# Altium PCB STAmeba.PcbDoc (part 3 of 3)
Units mm, origin at the board's own origin, x right, y up, seen from the top; angles counter-clockwise.
Board outline 121.75 x 98.31 mm, 2 copper layers (Top Layer, Bottom Layer); 122 components, 112 nets, 521 pads, 187 vias.
Unrouted connection lines stored in the file: 4.
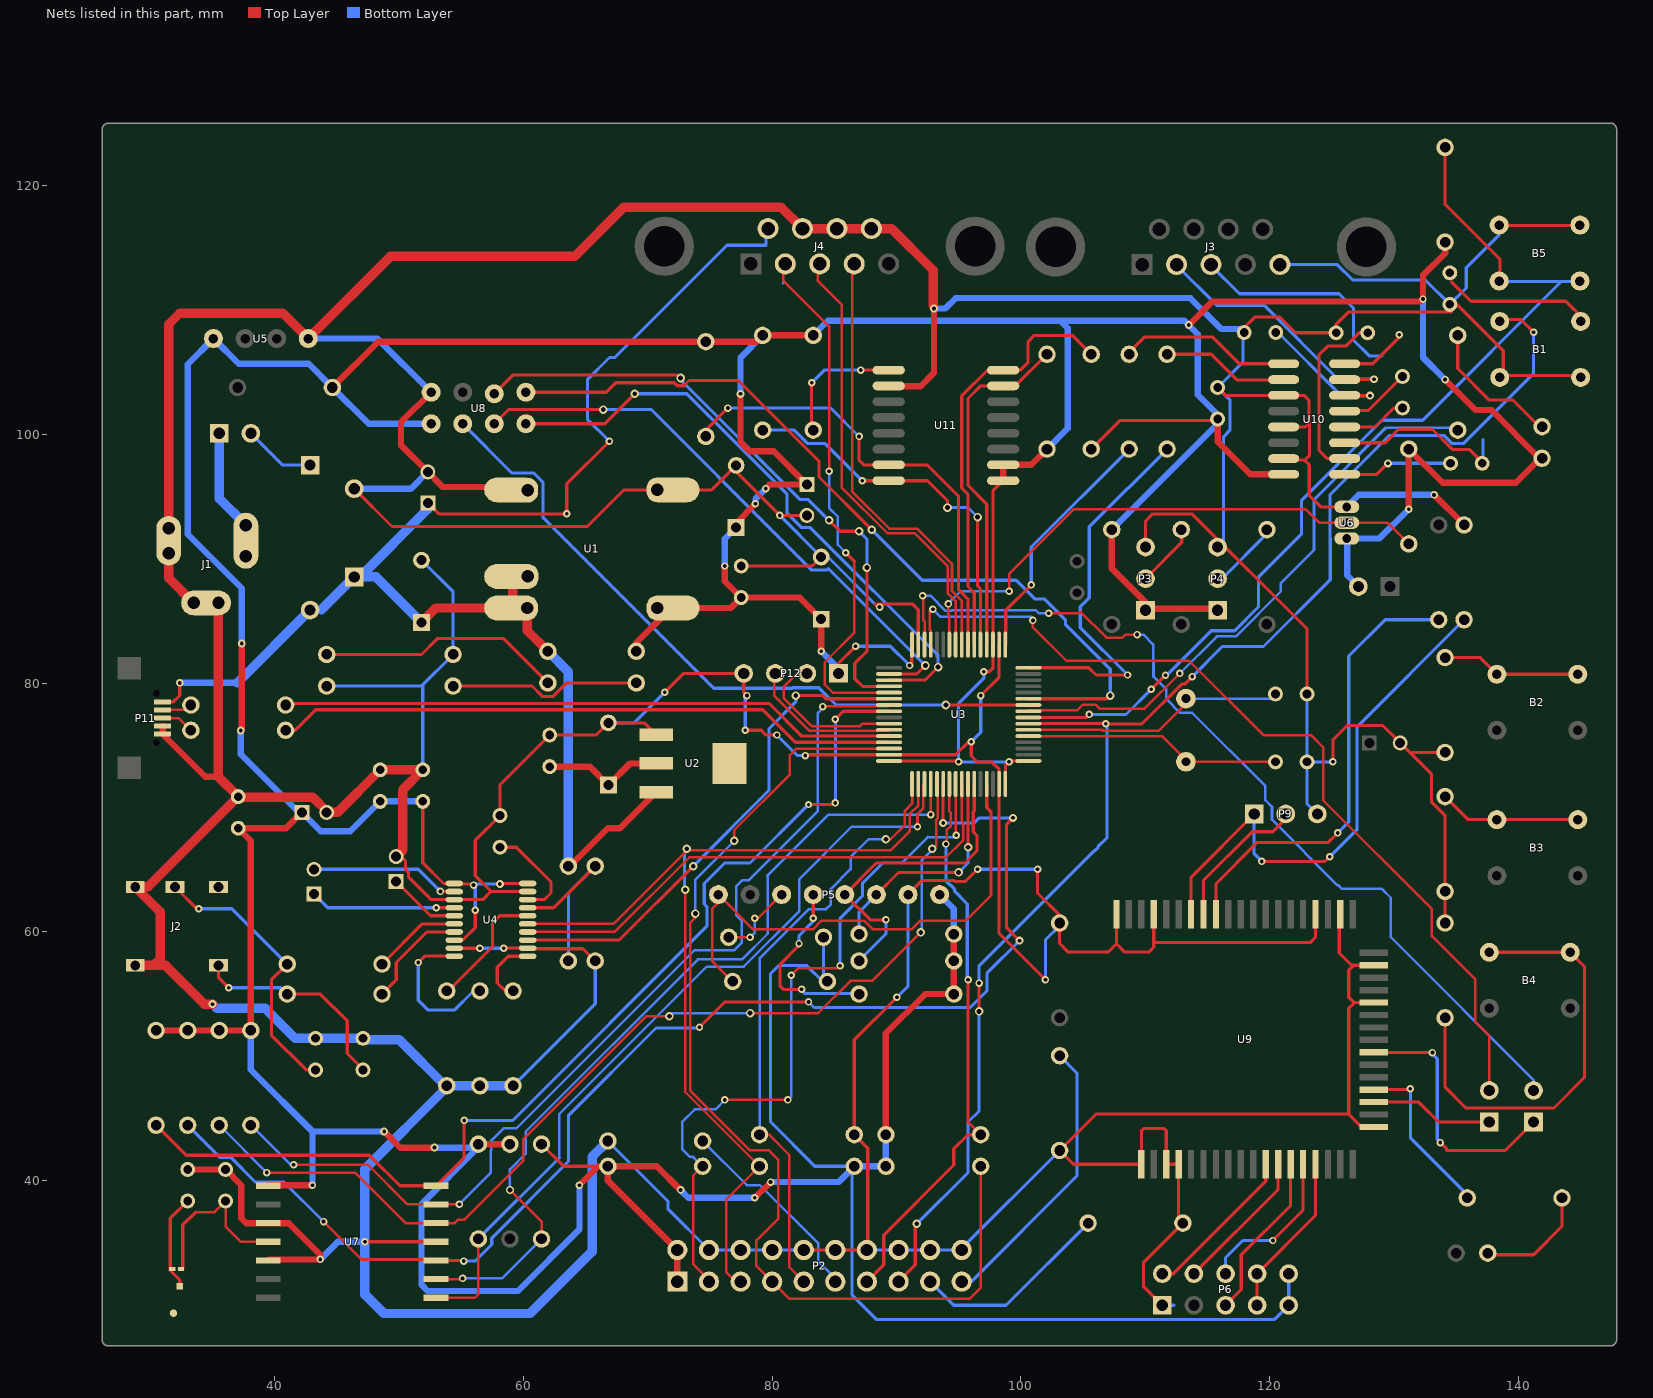
[diagram p2: the nets of this part, all layers, seen from the top]

## Via types
v1: diameter 0.6, hole 0.3, Top Layer to Bottom Layer, 130 vias
v2: diameter 0.686, hole 0.381, Top Layer to Bottom Layer, 29 vias
v3: diameter 0.635, hole 0.305, Top Layer to Bottom Layer, 16 vias
v4: diameter 4, hole 3.5, Top Layer to Bottom Layer, 4 vias
v5: diameter 5, hole 3, Top Layer to Bottom Layer, 2 vias
v6: diameter 1.5, hole 1.4, Top Layer to Bottom Layer, 2 vias
v7: diameter 3.2, hole 3, Top Layer to Bottom Layer, 2 vias
v8: diameter 0.584, hole 0.279, Top Layer to Bottom Layer, 1 vias
v9: diameter 0.635, hole 0.381, Top Layer to Bottom Layer, 1 vias

## Nets (pads, with @x,y where several pads share a name; then routed paths per layer and width w, separated by ;. In a path a pad name is that pad's centre, name@x,y a point inside that pad or via, vN(x,y) a via of type N, cw(c..) or ccw(c..) an arc to the next point about the centre after c; other vN are vias at no path point) (continued)
GND: B1.3 B1.4 B5.1 B5.2 C1.1 C2.2 C3.2 C4.2 C5.1 C6.2 C7.2 C8.2 C10.1 C11.1 C12.1 C13.2 C14.2 C15.2 C16.2 C17.2 C19.2 C20.2 C21.2 C22.1 C23.1 C24.2 C26.2 C27.2 C29.2 D3.1 J1.2 J1.2A J1.2B J1.3 J1.3A J1.3B J2.1 J3.5 J4.7 J4.8 J4.9 P2.4 P2.6 P2.8 P2.10 P2.12 P2.14 P2.16 P2.18 P2.20 P3.3 P4.3 P5.2 P6.1 P9.3 P11.4 P11.5 P12.4 pad.3 R1.1 R2.1 R4.2 R9.1 R10.1 R11.1 R12.1 R18.1 R19.1 R20.1 R21.1 R41.2 R44.1 R45.1 R46.1 U1.2 U1.3 U2.1 U3.18 U3.31 U3.47 U3.63 U4.3 U4.9 U4.12 U4.19 U5.4 U6.1 U7.4 U7.10 U7.12 U8.2 U9.1 U9.2 U9.17 U9.27 U9.30 U9.33 U9.35 U9.48 U9.51 U9.52 U10.11 U10.13 U10.15 U11.10 | length 951.8
  Top Layer w0.254: U7.12@39.497,33.576 U7.12@39.576,33.655 ; D3.1@46.404,95.625 49.446,92.583 65.151,92.583 68.097,95.529 U1.2@70.762,95.529 U1.2@71.905,95.529 ; v1(47.268,35.076) U7.4@52.997,35.076 ; C19.2@49.784,66.04 50.165,66.04 50.542,65.663 50.542,65.021 50.765,64.798 50.765,64.424 52.604,62.585 U4.3@54.454,62.585 56.743,62.585 57.393,63.235 57.415,63.235 ; U4.9@54.454,58.685 54.465,58.674 v1(56.515,58.674) ; v1(58.42,58.674) 58.431,58.685 U4.12@60.354,58.685 60.398,58.641 64.803,58.641 R21.1@65.786,57.658 ; U4.19@60.354,63.235 60.352,63.233 57.417,63.233 57.415,63.235 ; U2.1@70.681,75.833 69.719,76.795 C6.2@66.845,76.795 65.869,75.819 C5.1@62.123,75.819 58.131,71.827 C17.2@58.131,69.342 56.134,67.345 56.134,64.516 57.415,63.235 ; v1(71.374,79.248) 72.898,80.772 P12.4@77.724,80.772 77.724,79.248 v1(77.978,78.994) ; U1.2@72.971,95.529 75.144,95.529 C2.2@77.111,97.496 77.111,96.974 v1(80.612,93.472) C7.2@82.798,93.472 ; C1.1@77.521,89.408 83.232,89.408 C8.2@83.954,90.13 ; v1(77.851,76.2) 79.121,76.2 79.502,75.819 v1(80.391,75.819) ; P2.10@82.55,34.417 P2.12@85.09,34.417 P2.14@87.63,34.417 87.695,34.482 87.695,42.607 R9.1@86.614,43.688 86.614,51.308 v1(90.043,54.737) ; v1(82.677,74.168) 82.741,74.232 U3.47@89.408,74.232 94.749,74.232 95.802,75.286 v1(96.012,75.286) 96.012,74.128 96.495,73.645 97.671,73.645 98.258,73.057 U3.63@98.258,71.882 98.258,59.857 v1(101.981,56.134) ; v1(88.646,86.106) 88.519,86.106 88.265,86.36 91.288,86.36 91.758,85.89 U3.31@91.758,83.082 ; P5.2@90.932,62.992 92.075,64.135 94.607,64.135 94.696,64.046 95.542,64.046 v1(96.52,65.024) ; v1(96.774,78.994) 98.258,80.478 U3.18@98.258,83.082 ; v1(101.346,65.024) 101.346,63.119 103.124,61.341 R4.2@103.124,60.706 103.124,59.055 103.81,58.369 107.01,58.369 107.69,59.049 ; U9.51@107.69,61.408 107.69,59.049 ; P3.3@110.029,90.932 110.029,93.011 110.617,93.599 113.792,93.599 113.792,93.569 123.012,84.349 C10.1@123.012,79.121 ; U9.48@110.69,61.408 110.69,59.128 ; P6.1@111.379,29.972 109.855,31.496 109.855,33.401 R11.1@113.03,36.576 112.69,36.916 U9.2@112.69,41.308 U9.1@111.69,41.308 111.69,44.012 111.506,44.196 109.906,44.196 109.69,43.98 U9.52@109.69,41.308 104.234,41.308 R12.1@103.124,42.418 106.045,45.339 126.365,45.339 ; C27.2@115.824,103.66 C27.2@115.824,103.759 116.459,103.124 U10.11@121.135,103.124 122.784,103.124 123.165,102.743 123.165,101.016 123.241,100.94 ; C29.2@117.856,108.458 118.837,109.439 120.802,109.439 122.088,108.153 C26.2@125.349,108.153 125.349,108.839 126.33,109.82 134.62,109.82 ; U10.15@121.135,98.044 121.262,97.917 122.809,97.917 ; U10.13@121.135,100.584 122.885,100.584 123.215,100.914 123.215,98.323 122.809,97.917 ; U9.35@123.69,61.408 123.69,59.555 123.263,59.128 110.69,59.128 ; v1(125.095,73.66) 125.095,75.438 126.238,76.581 129.103,76.581 C24.2@130.5,75.184 131.262,74.422 ; U9.33@125.69,61.408 125.603,61.321 125.603,58.293 126.588,57.308 126.777,57.308 ; U6.1@126.213,94.158 124.104,94.158 123.19,95.072 123.19,97.536 122.809,97.917 ; U9.17@127.369,44.335 126.365,45.339 ; U9.17@127.396,44.308 U9.17@128.365,44.308 ; U9.27@128.365,54.308 126.825,54.308 ; U9.30@128.365,57.308 126.777,57.308 ; R46.1@134.112,60.706 R45.1@134.112,63.246 134.112,69.337 133.031,70.418 133.031,72.653 131.262,74.422 ; R44.1@134.112,74.422 131.262,74.422 ; C12.1@134.493,110.439 135.052,110.439 138.788,106.703 138.788,104.72 B1.4@145.288,104.72 ; B5.1@138.455,116.789 B5.2@144.955,116.789 ; 107.69,59.049 108.37,58.369 110.287,58.369 110.69,58.772 110.69,59.128 ; 126.365,45.339 126.365,53.848 126.825,54.308 ; 126.777,57.308 126.365,56.896 126.365,54.737 126.794,54.308 126.825,54.308
  Top Layer w0.508: J2.1@28.804,63.602 29.058,63.602 J2.1@29.083,63.627 ; P11.4@31.005,76.534 P11.5@31.005,75.884 34.435,72.454 35.496,72.454 ; J1.2A@31.496,90.44 J1.2@31.496,91.44 ; C23.1@33.02,40.894 C22.1@36.068,40.894 37.338,39.624 37.338,36.957 37.719,36.576 U7.10@39.497,36.576 41.148,36.576 43.688,34.036 v1(43.688,33.655) U7.12@39.576,33.655 ; J1.3A@33.496,86.44 J1.3@34.496,86.44 J1.3B@35.496,86.44 ; U8.2@52.593,103.378 50.165,100.95 50.165,99.131 C3.2@52.324,96.972 53.538,95.758 59.154,95.758 60.094,95.758 U1.3@60.348,95.504 ; U11.10@89.38,103.886 89.405,103.861 91.948,103.861 93.015,104.927 v3(93.015,110.109) ; v1(133.223,95.123) R41.2@135.636,92.71
  Top Layer w0.762: J2.1@28.804,57.302 30.278,57.302 ; J2.1@28.804,63.602 30.811,61.595 30.811,57.835 30.278,57.302 ; J2.1@29.083,63.627 29.845,63.627 C13.2@37.084,70.866 ; J1.2A@31.496,90.44 31.496,88.44 J1.3A@33.496,86.44 ; J1.2B@31.496,92.44 31.496,108.839 32.385,109.728 40.682,109.728 U5.4@42.714,107.696 49.318,114.3 64.135,114.3 68.072,118.237 80.747,118.237 J4.7@82.448,116.535 J4.8@85.218,116.535 J4.9@87.988,116.535 89.611,116.535 92.964,113.182 v3@92.964,110.326 ; v3(35.027,54.178) 34.366,54.178 31.242,57.302 30.278,57.302 ; J1.3B@35.496,86.44 35.496,72.454 C13.2@37.084,70.866 ; C19.2@49.784,66.04 50.292,66.548 50.292,71.397 C16.2@51.92,73.025 C15.2@48.498,73.025 45.069,69.596 C14.2@44.196,69.596 44.196,69.694 43.059,70.831 37.119,70.831 C13.2@37.084,70.866
  Bottom Layer w0.254: R1.1@44.196,79.756 51.816,79.756 51.92,79.86 ; C21.2@47.168,51.435 C21.2@47.295,51.308 ; C4.2@51.816,89.876 54.356,87.336 R2.1@54.356,82.296 51.92,79.86 ; C16.2@51.92,73.025 51.92,79.86 ; v1@56.642,58.674 v1(58.42,58.674) ; R20.1@59.182,47.625 65.786,54.229 R21.1@65.786,57.658 ; R10.1@66.802,43.18 71.628,38.354 71.628,37.719 P2.4@74.93,34.417 P2.6@77.47,34.417 P2.8@80.01,34.417 P2.10@82.55,34.417 ; C6.2@66.845,76.795 68.921,76.795 v1(71.374,79.248) ; v1(77.851,76.2) 77.851,78.867 v1(77.978,78.994) ; v1(80.391,75.819) 82.042,74.168 v1(82.677,74.168) ; v1@80.518,93.472 v1(80.612,93.472) C8.2@83.954,90.13 ; C8.2@84.257,89.827 C8.2@83.954,90.13 ; P2.14@87.63,34.417 P2.16@90.17,34.417 P2.18@92.71,34.417 P2.20@95.25,34.417 95.25,34.544 R12.1@103.124,42.418 ; v1(88.646,86.106) 88.519,86.106 84.495,90.13 C8.2@83.954,90.13 ; v1(90.043,54.737) 90.932,55.626 P5.2@90.932,62.992 ; v1(96.012,75.286) 96.774,76.048 v1(96.774,78.994) ; v1(96.52,65.024) v1(101.346,65.024) ; v1(101.981,56.134) 101.981,59.353 103.124,60.496 R4.2@103.124,60.706 ; P6.1@111.379,29.972 112.32,29.972 ; P4.3@116.302,91.059 116.302,99.807 116.805,100.31 116.805,102.778 C27.2@115.824,103.759 117.856,105.791 C29.2@117.856,108.458 ; J3.5@120.831,113.642 125.445,113.642 126.684,112.402 132.53,112.402 C12.1@134.493,110.439 135.814,111.76 135.814,113.386 138.455,116.027 B5.1@138.455,116.789 ; C10.1@123.012,79.121 C11.1@123.012,73.66 ; P9.3@123.841,69.469 123.012,70.298 C11.1@123.012,73.66 ; v1(125.095,73.66) C11.1@123.012,73.66
  Bottom Layer w0.508: U5.4@42.714,107.696 48.275,107.696 U8.2@52.593,103.378 ; v1(43.688,33.655) 45.109,35.076 v1(47.268,35.076) ; D3.1@46.404,95.625 50.977,95.625 C3.2@52.324,96.972 ; v3(93.015,110.109) 93.929,110.109 94.767,110.947 113.614,110.947 116.103,108.458 C29.2@117.856,108.458 ; U6.1@126.213,94.158 127.178,95.123 v1(133.223,95.123)
  Bottom Layer w0.762: v3(35.027,54.178) 35.357,53.848 39.243,53.848 41.656,51.435 C20.2@43.303,51.435 C21.2@47.117,51.435 C21.2@47.168,51.435 ; C21.2@47.295,51.308 50.038,51.308 R18.1@53.848,47.498 ; R20.1@59.182,47.625 R19.1@56.515,47.625 53.975,47.625 R18.1@53.848,47.498 ; R10.1@66.802,43.18 65.532,41.91 65.532,34.29 60.554,29.312 48.793,29.312 47.268,30.837 v1(47.268,35.076) 47.268,40.918 R18.1@53.848,47.498
GPIOA_0: P7.1 U9.19 | length 10
  Top Layer w0.254: U9.19@128.365,46.308 132,46.308 133.604,44.704 P7.1@137.668,44.704
GPIOA_1: R43.2 U9.20 | length 13.6
  Top Layer w0.254: U9.20@128.365,47.308 131.255,47.308 v1(131.318,47.371)
  Bottom Layer w0.254: v1(131.318,47.371) 131.318,43.434 135.89,38.862 R43.2@135.89,38.608
GPIOA_4: P8.1 U9.23 | length 21
  Top Layer w0.254: U9.23@128.365,50.308 133.08,50.308 v1(133.096,50.292) ; v1(133.731,43.053) 134.239,42.545 134.239,42.418 138.938,42.418 P8.1@141.224,44.704
  Bottom Layer w0.254: v1(133.096,50.292) 133.096,50.165 133.477,49.784 133.477,43.307 v1(133.731,43.053)
GPIOB_0: P9.1 R41.1 U9.45 | length 43.4
  Top Layer w0.254: U9.45@113.69,61.408 113.69,64.398 P9.1@118.761,69.469 ; v1(119.38,65.659) 124.46,65.659 v1(124.841,66.04)
  Bottom Layer w0.254: P9.1@118.761,69.469 118.761,66.278 v1(119.38,65.659) ; v1(124.841,66.04) 127.035,68.234 127.035,76.494 135.631,85.09 R41.1@135.636,85.09
GPIOB_1: P9.2 U9.44 | length 12.3
  Top Layer w0.254: U9.44@114.69,61.408 114.69,64.144 118.593,68.047 120.269,68.047 121.691,69.469 P9.2@121.301,69.469
GPIOB_2: R42.1 U9.43 | length 37
  Top Layer w0.254: U9.43@115.69,61.408 115.69,63.874 118.999,67.183 124.714,67.183 v1(125.476,67.945)
  Bottom Layer w0.254: v1(125.476,67.945) 126.365,68.834 126.365,82.169 129.286,85.09 R42.1@133.604,85.09
GPIOE_0: P6.7 P6.8 U9.13 | length 13.3
  Top Layer w0.254: P6.7@118.999,29.972 P6.8@118.999,32.512 123.69,37.203 U9.13@123.69,41.308
GPIOE_1: P6.6 U9.12 | length 12.8
  Top Layer w0.254: v1(120.269,35.179) 122.69,37.6 U9.12@122.69,41.308
  Bottom Layer w0.254: P6.6@116.459,32.512 116.459,33.782 117.856,35.179 v1(120.269,35.179)
GPIOE_2: P6.5 U9.11 | length 13.5
  Top Layer w0.254: P6.5@116.459,29.972 117.729,31.242 117.729,34.036 121.69,37.997 U9.11@121.69,41.308
GPIOE_3: P6.4 U9.10 | length 11.6
  Top Layer w0.254: P6.4@113.919,32.512 120.69,39.283 U9.10@120.69,41.308
GPIOE_4: P6.2 U9.9 | length 12.8
  Top Layer w0.254: P6.2@111.379,32.512 112.268,32.512 119.69,39.934 U9.9@119.69,41.308
I2C1_SCL: P5.3 R27.2 U3.58 | length 18.5
  Top Layer w0.254: P5.3@88.392,62.992 90.17,64.77 v2(94.996,64.77) ; v2(95.758,66.802) U3.58@95.758,71.882
  Bottom Layer w0.254: R27.2@86.995,59.817 86.995,61.585 88.392,62.982 P5.3@88.392,62.992 ; v2(94.996,64.77) 95.758,65.532 v2(95.758,66.802)
I2C1_SDA: P5.4 R28.2 U3.59 | length 26
  Top Layer w0.254: v1(89.154,60.96) 87.884,60.96 P5.4@85.852,62.992 88.392,65.532 95.512,65.532 96.482,66.502 96.482,67.729 96.179,68.032 96.179,69.644 96.258,69.723 U3.59@96.258,71.882
  Bottom Layer w0.254: R28.2@86.995,57.658 89.154,59.817 v1(89.154,60.96)
I2S3_MCK: U3.38 U4.13 | length 40.5
  Top Layer w0.254: U4.13@60.354,59.335 67.717,59.335 v2(73.66,65.278) ; v2(81.915,78.994) 84.066,78.994 84.328,78.732 U3.38@89.408,78.732
  Bottom Layer w0.254: v2(73.66,65.278) 79.756,71.374 79.756,76.327 81.915,78.486 v2(81.915,78.994)
I2S3_SD: U3.57 U4.14 | length 42.6
  Top Layer w0.203: U4.14@60.354,59.985 67.351,59.985 73.343,65.977 93.963,65.977 95.377,67.39 95.377,68.758 95.258,68.877 95.258,70.767
  Top Layer w0.254: 95.258,70.767 U3.57@95.258,71.882
INPUT-5V: J1.1 J1.1A J1.1B P1.1 | length 8.3
  Bottom Layer w0.762: P1.1@35.56,100.076 35.56,94.826 J1.1B@37.696,92.69
JTCK/SWCLK: P2.9 R9.2 U3.49 | length 48.8
  Top Layer w0.203: R9.2@78.994,43.688 79.756,43.688 81.382,42.062 81.382,33.045 P2.9@82.55,31.877 ; v2(89.154,67.437) 89.535,67.437 90.678,68.58 90.678,69.723 91.258,70.303 U3.49@91.258,71.882
  Bottom Layer w0.203: R9.2@78.994,43.688 78.994,57.836 82.982,61.824 84.353,61.824 84.734,62.205 84.734,63.455 86.315,65.035 86.315,65.995 87.757,67.437 v2(89.154,67.437)
JTDI/I2S3_WS: P2.5 R6.2 U3.50 U4.15 | length 77.3
  Top Layer w0.203: U4.15@60.354,60.635 67.239,60.635 73.152,66.548 89.535,66.548 91.059,68.072 91.059,69.469 91.758,70.168 U3.50@91.758,71.882 ; v2(73.025,63.373) 73.025,47.117 R6.2@78.994,41.148 76.302,38.456 76.302,32.664 77.089,31.877 P2.5@77.47,31.877
  Bottom Layer w0.203: v2(73.025,63.373) 72.962,63.436 72.962,66.358 73.152,66.548 v2(73.152,66.675) v2@73.279,66.548
JTDO: P2.13 R8.2 U3.55 | length 45.8
  Top Layer w0.203: v1@94.036,67.112 94.036,68.172 94.374,68.511 94.374,69.557 94.258,69.672 U3.55@94.258,71.882
  Top Layer w0.254: P2.13@87.63,31.877 88.976,33.223 88.976,35.611 94.615,41.25 94.615,42.545 95.758,43.688 R8.2@96.774,43.688 95.758,44.704 v1(95.758,56.134) ; v1(93.98,67.056) v1@94.036,67.112
  Bottom Layer w0.254: v1(93.98,67.056) 93.98,64.1 94.675,63.405 94.675,63.255 95.696,62.235 95.696,56.196 v1(95.758,56.134)
JTMS/SWDIO: P2.7 R7.2 U3.46 | length 86.4
  Top Layer w0.203: v2(73.838,61.468) 73.838,61.138 73.406,60.706 73.406,47.239 78.227,42.418 79.756,42.418 80.518,41.656 80.518,36.957 78.74,35.179 78.74,33.147 P2.7@80.01,31.877 81.407,30.48 95.885,30.48 96.774,31.369 R7.2@96.774,41.148 ; v2(76.962,67.31) 76.962,68.174 81.432,72.644 81.432,74.193 81.971,74.732 U3.46@89.408,74.732
  Bottom Layer w0.203: v2(73.838,61.468) 73.838,64.186 v2(76.962,67.31)
NetB1_2: B1.2 C12.2 | length 11.9
  Top Layer w0.254: 134.62,112.268 136.195,110.693 143.815,110.693 B1.2@145.288,109.22
NetB2_1: B2.1 B2.2 R44.2 | length 11.2
  Top Layer w0.254: R44.2@134.112,82.042 136.938,82.042 B2.1@138.28,80.7 B2.2@144.78,80.7
NetB3_1: B3.1 B3.2 R45.2 | length 11.4
  Top Layer w0.254: R45.2@134.112,70.866 135.962,69.016 B3.1@138.28,69.016 B3.2@144.78,69.016
NetB4_1: B4.1 B4.2 R46.2 | length 35.5
  Top Layer w0.254: R46.2@134.112,53.086 134.112,47.498 135.775,45.835 142.863,45.835 145.311,48.283 145.311,57.205 B4.2@144.168,58.348 B4.1@137.668,58.348
NetC10_2: C10.2 U3.6 Y1.1 | length 21.3
  Top Layer w0.203: U3.6@100.608,76.232 101.981,76.232 106.548,76.232 106.602,76.178 111.103,76.178 113.276,78.351 Y1.1@113.276,78.749
  Bottom Layer w0.203: Y1.1@113.276,78.749 120.1,78.749 C10.2@120.472,79.121
NetC11_2: C11.2 U3.5 Y1.2 | length 20.8
  Top Layer w0.203: U3.5@100.608,75.732 111.339,75.732 113.276,73.795 Y1.2@113.276,73.669 120.463,73.669 C11.2@120.472,73.66
NetC17_1: C17.1 U4.18 | length 8.2
  Top Layer w0.254: C17.1@58.131,66.802 59.436,66.802 62.23,64.008 62.23,63.119 61.696,62.585 U4.18@60.354,62.585
NetC18_1: C18.1 U4.4 | length 11.7
  Top Layer w0.254: v1(53,61.935) U4.4@54.454,61.935
  Bottom Layer w0.254: C18.1@43.18,63.024 44.269,61.935 v1(53,61.935)
NetC18_2: C18.2 U4.2 | length 12
  Top Layer w0.254: v1(53.34,63.246) 53.351,63.235 U4.2@54.454,63.235
  Bottom Layer w0.254: C18.2@43.18,65.024 51.562,65.024 v1(53.34,63.246)
NetC19_1: C19.1 U4.5 | length 5.8
  Top Layer w0.254: C19.1@49.784,64.04 52.539,61.285 U4.5@54.454,61.285
NetC20_1: C20.1 J2.3 R15.2 | length 22.5
  Top Layer w0.254: J2.3@32.004,63.602 33.757,61.849 v1(33.909,61.849) ; R15.2@41.023,57.404 39.753,56.134 39.753,51.687 42.545,48.895 C20.1@43.303,48.895
  Bottom Layer w0.254: v1(33.909,61.849) 36.578,61.849 R15.2@41.023,57.404
NetC21_1: C21.1 J2.2 R16.2 | length 17.4
  Top Layer w0.254: J2.2@35.504,57.302 35.504,56.317 v1(36.322,55.499) ; R16.2@41.023,54.991 43.688,54.991 45.847,52.832 45.847,50.216 C21.1@47.295,48.768
  Bottom Layer w0.254: v1(36.322,55.499) 40.515,55.499 R16.2@41.023,54.991
NetC22_2: C22.2 L1.1 U7.11 | length 13.8
  Top Layer w0.203: 33.655,37.465 35.179,37.465 C22.2@36.068,38.354 36.068,36.322 37.314,35.076 U7.11@39.497,35.076
  Top Layer w0.254: L1.1@32.623,32.893 32.623,36.433 33.655,37.465
NetC23_2: C23.2 E1.1 L1.2 | length 7.8
  Top Layer w0.254: E1.1@32.385,31.496 32.385,32.004 31.623,32.766 31.623,36.957 C23.2@33.02,38.354
NetC25_1: C25.1 U10.3 | length 14.6
  Top Layer w0.254: U10.3@126.035,99.314 129.286,99.314 130.353,100.381 133.096,100.381 134.696,98.781 136.068,98.781 137.092,97.756 C25.1@137.092,97.663
  Bottom Layer w0.254: C25.1@137.092,97.663 137.16,97.731 137.16,99.568
NetC25_2: C25.2 U10.1 | length 8.9
  Top Layer w0.254: U10.1@126.035,96.774 128.626,96.774 v3(129.515,97.663)
  Bottom Layer w0.254: v3(129.515,97.663) C25.2@134.552,97.663
NetC26_1: C26.1 U10.2 | length 14.7
  Top Layer w0.254: U10.2@126.035,98.044 124.638,98.044 123.977,98.704 123.977,106.401 124.663,107.086 126.136,107.086 127.203,108.153 C26.1@127.889,108.153
NetC28_1: C28.1 U10.5 | length 5.8
  Top Layer w0.254: U10.5@126.035,101.854 126.086,101.905 127.94,101.905 C28.1@130.683,104.648
NetC28_2: C28.2 U10.4 | length 5.3
  Top Layer w0.254: U10.4@126.035,100.584 128.473,100.584 129.997,102.108 C28.2@130.683,102.108
NetC29_1: C29.1 U10.6 | length 11.9
  Top Layer w0.254: U10.6@126.035,103.124 128.041,103.124 v3(128.067,103.099)
  Bottom Layer w0.254: C29.1@120.396,108.458 125.755,103.099 v3(128.067,103.099)
NetD1_2: D1.2 R1.2 | length 15.5
  Top Layer w0.254: R1.2@54.356,79.756 60.701,79.756 61.528,78.929 62.424,78.929 63.505,80.01 D1.2@69.088,80.01
NetD2_2: D2.2 R2.2 | length 19.8
  Top Layer w0.254: R2.2@44.196,82.296 51.816,82.296 53.086,83.566 58.42,83.566 D2.2@61.976,80.01
NetD4_2: D4.2 R43.1 | length 9.3
  Top Layer w0.254: D4.2@137.541,34.163 137.668,34.036 141.224,34.036 143.51,36.322 R43.1@143.51,38.608
NetD5_2: D5.2 R51.2 | length 11.2
  Top Layer w0.254: R51.2@135.128,107.95 135.128,105.283 137.668,102.743 139.573,102.743 D5.2@141.732,100.584
NetF1_1: F1.1 P1.2 | length 5.8
  Bottom Layer w0.254: P1.2@38.1,100.076 40.657,97.519 F1.1@42.862,97.519
NetP2_11: P2.11 R10.2 | length 16.3
  Bottom Layer w0.203: R10.2@74.422,43.18 77.978,39.624 79.021,39.624 83.718,34.926 83.718,33.503 85.09,32.131 P2.11@85.09,31.877
NetP2_17: P2.17 R11.2 | length 16.2
  Bottom Layer w0.254: P2.17@92.71,31.877 94.615,29.972 98.806,29.972 R11.2@105.41,36.576
NetP2_19: P2.19 R12.2 | length 23
  Bottom Layer w0.254: P2.19@95.25,31.877 96.012,31.877 104.521,40.386 104.521,48.641 R12.2@103.124,50.038
NetP3_2: P3.2 R13.2 | length 4.8
  Top Layer w0.254: P3.2@110.029,88.392 112.943,91.306 R13.2@112.943,91.948
NetP4_2: P4.2 R14.2 | length 5.3
  Bottom Layer w0.254: P4.2@116.302,88.519 119.786,92.003 R14.2@119.786,92.329
NetP5_5: P5.5 R29.2 | length 15.2
  Top Layer w0.254: v1(82.169,59.055) 82.169,58.928 80.645,57.404 80.645,55.626 80.899,55.372 v1(82.372,55.372) ; v1(83.312,61.087) P5.5@83.312,62.992
  Bottom Layer w0.254: v1(82.169,59.055) 82.169,59.69 83.312,60.833 v1(83.312,61.087) ; v1(82.372,55.372) 82.321,55.372 82.666,55.028 85.607,55.028 85.621,55.042 86.944,55.042 R29.2@86.995,54.991
NetP5_6: P5.6 R30.2 | length 6.3
  Top Layer w0.203: R30.2@76.517,59.563 v1(78.232,59.563) ; v1(78.613,61.087) 78.867,61.087 P5.6@80.772,62.992
  Bottom Layer w0.203: v1(78.232,59.563) 78.613,59.944 v1(78.613,61.087)
NetP11_2: P11.2 R48.1 | length 2.4
  Top Layer w0.203: P11.2@31.005,77.834 32.876,77.834 R48.1@33.274,78.232
NetP11_3: P11.3 R50.1 | length 2.7
  Top Layer w0.203: P11.3@31.005,77.184 32.29,77.184 R50.1@33.274,76.2
NetR18_2: R18.2 U4.16 | length 10.2
  Top Layer w0.254: R18.2@53.848,55.118 57.531,58.801 57.531,60.706 58.11,61.285 U4.16@60.354,61.285
NetR19_2: R19.2 U4.10 | length 11.4
  Top Layer w0.254: v1(51.562,57.531) 52.07,58.039 54.45,58.039 U4.10@54.454,58.035
  Bottom Layer w0.254: v1(51.562,57.531) 51.562,54.483 52.324,53.721 54.483,53.721 R19.2@55.88,55.118
NetR20_2: R20.2 U4.11 | length 5.6
  Top Layer w0.254: R20.2@59.182,55.245 58.547,55.245 57.912,55.88 57.912,57.15 58.797,58.035 U4.11@60.354,58.035
NetR26_1: R26.1 U11.9 | length 10.5
  Top Layer w0.254: v1(83.185,104.14) 83.185,100.457 R26.1@83.312,100.33 ; v1(87.122,105.156) U11.9@89.38,105.156
  Bottom Layer w0.254: v1(83.185,104.14) 84.201,105.156 v1(87.122,105.156)
NetR47_2: R47.2 U10.10 | length 10.2
  Top Layer w0.254: R47.2@111.76,106.426 115.316,106.426 117.373,104.369 121.109,104.369 U10.10@121.135,104.394
NetR49_2: R49.2 U10.9 | length 14
  Top Layer w0.254: R49.2@108.712,106.426 108.712,106.578 109.957,107.823 115.392,107.823 117.551,105.664 U10.9@121.135,105.664
NJTRST: P2.3 R5.2 U3.56 | length 59.2
  Top Layer w0.203: R5.2@74.422,41.148 73.66,40.386 73.66,33.274 74.93,32.004 P2.3@74.93,31.877 ; v1(76.2,46.482) v1(81.28,46.482) ; v1(81.534,56.515) 82.082,57.063 85.257,57.063 v1(85.471,57.277) ; U3.56@94.758,71.882 94.758,67.555 94.818,67.615 v1(94.818,67.767)
  Bottom Layer w0.203: R5.2@74.422,41.148 73.66,41.91 73.406,41.91 72.771,42.545 72.771,44.704 73.787,45.72 75.438,45.72 v1(76.2,46.482) ; v1(81.28,46.482) 81.534,46.736 v1(81.534,56.515) ; 88.9,65.532 90.434,65.532 92.525,67.622 92.537,67.61 94.671,67.61 94.818,67.758 v1(94.818,67.767)
  Bottom Layer w0.254: v1(85.471,57.277) 85.471,61.087 87.274,62.89 87.274,63.906 88.9,65.532
NRST: B1.1 P2.15 U3.7 | length 115.4
  Top Layer w0.127: v2@91.516,36.525 v2(91.643,36.525)
  Top Layer w0.254: P2.15@90.17,31.877 91.516,33.223 v2@91.516,36.525 ; v2(96.647,53.594) v1(96.647,55.88) ; U3.7@100.608,76.732 v1(106.831,76.732) 106.855,76.708 109.727,76.708 112.927,79.908 113.182,79.908 v1(113.792,80.518) ; B1.1@138.788,109.22 140.208,109.22 v1(141.224,108.204)
  Bottom Layer w0.254: P2.15@90.043,31.75 P2.15@90.17,31.877 ; v2(91.643,36.525) 95.756,40.638 95.756,44.706 96.647,45.596 v2(96.647,53.594) ; v1(96.647,55.88) 96.647,57.277 105.893,66.523 105.959,66.523 106.197,66.761 106.197,66.827 106.934,67.564 v1@106.934,76.835 ; v1(113.792,80.518) 116.205,82.931 119.507,82.931 124.882,88.306 124.882,91.637 ; 124.857,91.489 124.857,95.139 129.605,99.887 134.042,99.887 134.68,99.249 135.576,99.249 141.224,104.897 v1(141.224,108.204)
OUTL: R15.1 U4.6 | length 7.1
  Top Layer w0.254: R15.1@48.643,57.404 51.874,60.635 U4.6@54.454,60.635
OUTR: R16.1 U4.7 | length 8.7
  Top Layer w0.254: R16.1@48.643,54.991 49.784,56.132 49.784,57.531 52.238,59.985 U4.7@54.454,59.985
PB0: R33.2 U3.26 U6.2 | length 45.4
  Top Layer w0.203: v1(94.183,86.36) 94.183,85.522 94.258,85.447 U3.26@94.258,83.082 ; v1(99.06,87.376) 99.06,88.773 104.267,93.98 122.885,93.98 123.977,92.888 U6.2@126.213,92.888 129.491,92.888 R33.2@131.192,91.186
  Bottom Layer w0.203: v1@94.234,86.464 95.146,87.376 v1(99.06,87.376)
PB8: P5.8 R31.2 U3.61 | length 41.7
  Top Layer w0.203: R31.2@76.835,56.007 75.184,57.658 75.184,61.849 75.692,62.357 P5.8@75.692,62.992 78.486,60.198 83.279,60.198 83.953,60.873 87.432,60.873 88.107,60.198 91.214,60.198 91.889,60.873 95.544,60.873 97.594,62.923
  Top Layer w0.254: U3.61@97.258,71.882 97.258,70.001 97.594,69.665 97.594,62.923
PC0: B5.3 B5.4 R52.1 U3.8 | length 79.7
  Top Layer w0.254: U3.8@100.608,77.232 105.274,77.232 v1(105.512,77.47) ; v1(110.49,79.502) 111.608,80.62 v1(111.633,80.62) ; R52.1@134.036,123.368 134.112,123.292 R52.1@134.112,123.063 134.112,118.468 138.534,114.046 B5.3@138.534,112.42
  Bottom Layer w0.254: v1(105.512,77.47) 108.458,77.47 v1(110.49,79.502) ; v1(111.633,80.62) 111.735,80.62 115.316,84.201 117.19,84.201 119.103,86.114 119.103,88.496 122.555,91.948 122.555,94.64 129.035,101.121 132.305,101.121 143.474,112.289 ; B5.3@138.455,112.289 143.474,112.289 ; B5.4@144.955,112.289 143.474,112.289
PC1: R51.1 U3.9 | length 47
  Top Layer w0.203: U3.9@100.608,77.732 100.704,77.828 104.549,77.828 104.978,78.257 106.02,78.257 106.329,77.948 109.952,77.948 v1(112.776,80.772)
  Bottom Layer w0.203: v1(112.776,80.772) 115.76,83.757 117.284,83.757 120.904,87.376 120.904,88.039 123.571,90.706 123.571,94.741 ; 129.338,100.508 134.95,100.508 R51.1@135.128,100.33
  Bottom Layer w0.254: 123.571,94.741 129.338,100.508
PC2: U3.10 U8.3 | length 56.5
  Top Layer w0.254: v2(93.98,78.232) U3.10@100.608,78.232
  Bottom Layer w0.254: U8.3@55.133,100.838 59.086,96.885 60.858,96.885 61.579,96.164 61.579,93.32 75.325,79.573 81.614,79.573 81.657,79.616 83.763,79.616 85.147,78.232 v2(93.98,78.232)
PC3: U3.11 U8.8 | length 66.9
  Top Layer w0.254: U8.8@60.213,103.378 66.675,103.378 67.437,104.14 72.145,104.14 72.386,103.899 72.902,103.899 73.321,104.318 77.292,104.318 83.779,97.831 83.779,96.561 v2(88.011,92.329) ; U3.11@100.608,78.732 106.926,78.732 v2(107.188,78.994)
  Bottom Layer w0.254: v2(88.011,92.329) 92.075,88.265 99.625,88.265 101.124,86.766 101.886,86.766 103.581,85.071 103.581,84.709 107.188,81.102 v2(107.188,78.994)
PC4: J4.4 U3.24 | length 35.6
  Top Layer w0.203: J4.4@86.603,113.695 86.437,113.529 86.437,95.394 89.426,92.405 91.644,92.405 94.469,89.58 94.469,87.395 95.258,86.606 U3.24@95.258,83.082
PC5: J4.3 U3.25 | length 36.6
  Top Layer w0.203: J4.3@83.833,113.695 83.667,113.529 83.667,112.349 85.598,110.418 85.598,95.73 89.304,92.024 91.486,92.024 94.114,89.396 94.114,87.248 94.758,86.603 U3.25@94.758,83.082
PC6: J4.2 U3.37 | length 42.9
  Top Layer w0.203: J4.2@81.063,113.695 80.897,113.529 80.897,112.349 84.582,108.664 v1(84.582,97.028) ; 86.614,89.789 86.614,84.045 84.238,81.669 84.238,79.875 84.881,79.232 U3.37@89.408,79.232
  Top Layer w0.254: v1(85.928,90.475) 86.614,89.789
  Bottom Layer w0.203: 80.897,112.143 80.897,112.349 ; v1(84.582,97.028) 84.582,94.079 85.281,93.38 85.281,91.123 v1(85.928,90.475)
RX1_232: J3.3 U10.8 | length 23.8
  Top Layer w0.254: U10.8@126.035,105.664 128.295,105.664 130.454,107.823 130.429,107.848 v3(130.429,108.001)
  Bottom Layer w0.254: J3.3@115.291,113.642 115.316,113.616 115.316,113.56 117.578,111.298 125.582,111.298 126.746,110.134 126.746,107.569 128.016,106.299 129.032,106.299
SDIO_CLK: R37.1 U3.53 U7.5 | length 82.9
  Top Layer w0.203: v1(39.37,40.64) 46.482,40.64 50.546,36.576 U7.5@52.997,36.576 54.483,36.576 54.737,36.83 55.245,36.83 59.984,41.569 59.984,43.296 69.901,53.213 v2(71.755,53.213) ; v2(78.232,53.467) 83.717,53.467 86.297,56.047 88.051,56.047 v2(91.948,59.944) ; v2(92.888,66.675) 92.964,66.675 93.187,66.898 93.187,68.976 93.312,69.101 93.312,71.828 U3.53@93.258,71.882
  Bottom Layer w0.203: R37.1@35.56,44.45 v1(39.37,40.64) ; v2(71.755,53.213) 72.009,53.467 v2(78.232,53.467) ; v2(91.948,59.944) 92.05,60.046 92.05,65.761 92.888,66.599 v2(92.888,66.675)
SDIO_CMD: R36.1 U3.54 U7.3 | length 105.3
  Top Layer w0.254: v1(43.942,36.703) 46.99,33.655 52.918,33.655 U7.3@52.997,33.576 55.166,33.576 v1(55.214,33.528) ; v1(74.168,52.324) 76.2,54.356 v1(82.931,54.356) ; v3(93.758,68.739) U3.54@93.758,71.882 ; v3(99.365,69.159) 98.857,68.651 98.857,60.325 v3(99.898,59.284)
  Bottom Layer w0.254: R36.1@33.02,44.45 35.595,41.875 36.474,41.875 38.471,39.878 40.767,39.878 v1(43.942,36.703) ; v1(55.214,33.528) 56.139,33.528 57.469,34.858 57.469,35.371 63.627,41.529 63.627,45.212 70.675,52.261 74.105,52.261 v1(74.168,52.324) ; v1(82.931,54.356) 83.377,53.91 95.939,53.91 97.282,55.253 97.282,56.693 97.307,56.693 v3(99.898,59.284) ; v3(93.758,68.739) 96.241,68.739 96.661,69.159 v3(99.365,69.159) v3@99.441,69.159
SDIO_D0: R38.1 U3.39 U7.6 | length 80.1
  Top Layer w0.203: v1(41.529,41.275) 47.498,41.275 50.697,38.076 U7.6@52.997,38.076 53.021,38.1 v1(54.864,38.1) ; v1(84.074,78.105) 84.082,78.113 88.318,78.113 88.341,78.136 89.312,78.136 U3.39@89.408,78.232
  Bottom Layer w0.203: R38.1@38.1,44.45 41.275,41.275 v1(41.529,41.275) ; v1(54.864,38.1) 57.404,40.64 57.404,42.41 57.444,42.449 57.444,43.22 58.42,44.196 59.436,44.196 73.747,58.507 76.954,58.507 77.572,59.126 77.572,60.883 77.114,61.341 77.114,63.652 77.597,64.135 78.115,64.135 83.693,69.713 83.693,77.597 84.074,77.978 v1(84.074,78.105)
SDIO_D1: R39.1 U3.40 U7.7 | length 85.3
  Top Layer w0.254: R39.1@30.48,44.45 32.893,42.037 47.625,42.037 50.086,39.576 U7.7@52.997,39.576 55.245,41.824 v1(55.245,44.831) ; v8(82.931,70.231) 84.963,70.231 v1(85.09,70.358) ; v1(85.09,77.089) 85.733,77.732 U3.40@89.408,77.732
  Bottom Layer w0.254: v1(55.245,44.831) 59.147,44.831 74.765,60.448 74.765,62.014 74.549,62.23 74.549,63.881 76.2,65.532 78.232,65.532 82.801,70.101 83.061,70.101 83.19,70.231 v8(82.931,70.231) ; v1(85.09,70.358) v1(85.09,77.089)
SDIO_D2: R34.1 U3.51 U7.1 | length 64.2
  Top Layer w0.203: U7.1@52.997,30.576 56.103,30.576 56.388,30.861 R34.1@56.388,35.306 ; v1(91.694,68.453) 91.694,69.469 92.162,69.937 92.162,71.786 U3.51@92.258,71.882
  Bottom Layer w0.203: 62.89,41.808 62.89,45.336 74.744,57.19 77.713,57.19 82.194,61.671 82.194,64.237 86.411,68.453 v1(91.694,68.453)
  Bottom Layer w0.254: R34.1@56.388,35.306 62.89,41.808
SDIO_D3: R35.1 U3.52 U7.2 | length 68.4
  Top Layer w0.203: U7.2@52.997,32.076 55.063,32.076 v1(55.118,32.131) ; v9(58.928,39.243) 61.468,36.703 R35.1@61.468,35.306 ; v1(92.758,69.421) U3.52@92.758,71.882
  Bottom Layer w0.203: v1(55.118,32.131) 58.293,32.131 R35.1@61.468,35.306 ; v9(58.928,39.243) 58.928,40.894 60.198,42.164 60.198,43.942 74.041,57.785 77.597,57.785 79.654,59.842 79.654,64.516 79.629,64.516 84.534,69.421 v1(92.758,69.421)
SPI1_CS: R22.2 U3.20 U11.7 | length 28.2
  Top Layer w0.254: U3.20@97.258,83.082 97.258,94.385 95.758,95.885 95.758,102.87 96.774,103.886 U11.7@98.58,103.886 99.568,103.886 R22.2@102.108,106.426
SPI1_MISO: R23.1 U3.22 U11.8 | length 34.4
  Top Layer w0.254: U3.22@96.258,83.082 96.258,87.257 95.758,87.757 95.758,95.167 95.25,95.675 95.25,103.08 97.326,105.156 U11.8@98.58,105.156 99.949,105.156 100.584,105.791 100.584,107.442 101.092,107.95 104.14,107.95 R23.1@105.664,106.426
SPI1_MOSI: R24.1 U3.23 U11.15 | length 37.9
  Top Layer w0.254: R24.1@74.676,99.822 74.676,100.33 v1(76.454,102.108) ; v1(86.995,99.822) 86.995,97.917 87.376,97.536 U11.15@89.38,97.536 92.456,97.536 94.996,94.996 94.996,87.503 95.758,86.741 U3.23@95.758,83.082
  Bottom Layer w0.254: v1(76.454,102.108) 84.709,102.108 v1(86.995,99.822)
SPI1_SCK: R25.1 U3.21 U11.16 | length 30.8
  Top Layer w0.254: v1(87.249,96.266) U11.16@89.38,96.266 92.5,96.266 94.107,94.659 v2(94.107,94.107) ; v2(96.52,93.345) 96.52,87.808 96.758,87.57 U3.21@96.758,83.082
  Bottom Layer w0.254: R25.1@79.248,100.33 81.783,100.33 82.864,99.249 84.266,99.249 v1(87.249,96.266) ; v2(94.107,94.107) 95.758,94.107 v2(96.52,93.345)
SPI2_MISO: U3.35 U8.7 | length 49.1
  Top Layer w0.254: U8.7@60.213,100.838 66.548,100.838 v2(68.961,103.251) ; U3.35@89.408,80.232 92.297,80.232 v2(93.345,81.28)
  Bottom Layer w0.254: v2(68.961,103.251) 73.152,103.251 81.192,95.211 81.192,93.691 82.392,92.491 83.087,92.491 93.345,82.233 v2(93.345,81.28)
SPI2_MOSI: U3.36 U8.6 | length 50.8
  Top Layer w0.254: U8.6@57.673,103.251 59.197,104.775 72.39,104.775 v2(72.644,104.521) ; v2(84.582,93.091) 85.471,92.202 v2(86.995,92.202) ; v2(87.63,89.281) 87.63,82.558 86.652,81.58 86.652,80.353 87.273,79.732 U3.36@89.408,79.732
  Bottom Layer w0.254: v2(72.644,104.521) 72.644,104.371 82.273,94.742 82.915,94.742 84.566,93.091 v2(84.582,93.091) ; v2(86.995,92.202) 87.63,91.567 v2(87.63,89.281)
SPI2_SCK: U3.34 U8.5 | length 47
  Top Layer w0.254: U8.5@57.673,100.838 58.816,101.981 v2(66.421,101.981) ; U3.34@89.408,80.732 91.654,80.732 v2(92.329,81.407)
  Bottom Layer w0.254: v2(66.421,101.981) 70.307,101.981 75.641,96.647 75.641,96.614 83.182,89.074 84.392,89.074 84.527,89.209 v2(92.329,81.407)
TTL_RX: P12.3 U3.43 | length 12.2
  Top Layer w0.203: P12.3@80.264,80.772 80.188,80.696 80.188,78.969 82.982,76.175 89.351,76.175 U3.43@89.408,76.232
TTL_TX: P12.2 U3.42 | length 12.7
  Top Layer w0.203: P12.2@82.804,80.772 82.017,80.772 80.95,79.705 80.95,78.765 83.185,76.53 87.071,76.53 87.273,76.732 U3.42@89.408,76.732
TX1_232: J3.2 U10.7 | length 22.1
  Top Layer w0.254: U10.7@126.035,104.394 128.372,104.394 v3(128.397,104.419)
  Bottom Layer w0.254: J3.2@112.521,113.642 112.521,113.586 115.743,110.363 119.557,110.363 125.5,104.419 v3(128.397,104.419)
USART2_RX: R49.1 U3.17 | length 19.8
  Top Layer w0.254: U3.17@98.789,83.082 98.789,85.835 v1(100.838,87.884)
  Bottom Layer w0.254: v1(100.838,87.884) 100.838,90.932 R49.1@108.712,98.806
USART2_TX: R47.1 U3.16 | length 30.9
  Top Layer w0.254: U3.16@100.608,81.232 105.458,81.232 106.045,80.645 v1(108.585,80.645)
  Bottom Layer w0.254: v1(108.585,80.645) 104.775,84.455 104.775,86.116 105.502,86.843 105.502,92.548 R47.1@111.76,98.806
USART3_RX: P8.2 U3.30 | length 75.6
  Top Layer w0.203: v1(92.1,87.02) 92.139,86.982 92.139,85.082 92.278,84.942 92.278,83.102 U3.30@92.258,83.082 ; v1(102.235,85.598) 104.679,85.598 104.806,85.725 106.878,83.653 108.164,83.653 108.407,83.896 v1(109.347,83.896)
  Bottom Layer w0.203: v1(92.1,87.02) 92.735,87.02 93.95,85.806 94.413,85.806 94.459,85.852 101.219,85.852 101.473,85.598 v1(102.235,85.598) ; v1(109.347,83.896) 109.855,83.896 110.642,83.109 110.642,81.636 110.668,81.61 110.668,80.518 111.697,79.489 111.697,78.713 112.803,77.606 113.783,77.606 119.658,71.731 119.658,70.575 120.195,70.037 120.195,69.011 125.478,63.729 125.549,63.729 125.832,63.446 129.035,63.446 129.743,62.738 129.743,59.563 141.224,48.082 P8.2@141.224,47.244
USART3_TX: P7.2 U3.29 | length 72.6
  Top Layer w0.203: U3.29@92.758,83.082 92.761,83.085 92.761,84.209 92.664,84.306 92.664,85.781 92.812,85.928 v1(92.935,85.928) ; v1(100.973,85.034) 100.973,84.473 103.657,81.788 113.538,81.788 119.516,75.81 123.326,75.81 124.299,74.837 124.299,70.575 133.056,61.817 133.056,59.65 136.55,56.156 136.55,52.73 137.668,51.613 P7.2@137.668,47.244
  Bottom Layer w0.203: v1(92.935,85.928) 93.519,85.344 100.838,85.344 100.973,85.209 v1(100.973,85.034)
USB_N: R48.2 U3.44 | length 49.7
  Top Layer w0.254: R48.2@40.894,78.232 41.021,78.359 79.756,78.359 82.383,75.732 U3.44@89.408,75.732
USB_P: R50.2 U3.45 | length 50.3
  Top Layer w0.254: R50.2@40.894,76.2 41.656,76.2 43.307,77.851 79.248,77.851 81.867,75.232 U3.45@89.408,75.232
VCC-1.8V: C5.2 C6.1 U2.2 U2.4 | length 9.9
  Top Layer w0.508: C5.2@62.123,73.279 65.361,73.279 C6.1@66.845,71.795 68.583,73.533 U2.2@70.681,73.533
VCC-3.3V: C1.2 C2.1 C7.1 C8.1 C13.1 C14.1 C15.1 C16.1 C27.1 D1.1 D5.1 P2.1 P2.2 P3.1 P4.1 P5.1 P6.9 P6.10 P10.2 P12.1 R3.2 R5.1 R6.1 R7.1 R8.1 R22.1 R23.2 R24.2 R25.2 R26.2 R27.1 R28.1 R29.1 R30.1 R31.1 R32.1 R33.1 R34.2 R35.2 R36.2 R37.2 R38.2 R39.2 R40.2 R52.2 U1.1 U3.1 U3.19 U3.32 U3.48 U3.64 U4.1 U4.8 U4.20 U5.1 U6.3 U7.8 U8.1 U10.16 U11.1 U11.2 | length 650.7
  Top Layer w0.254: U7.8@39.497,39.576 U7.8@39.545,39.624 ; C16.1@51.92,70.485 51.92,65.555 53.59,63.885 U4.1@54.454,63.885 54.498,63.841 55.92,63.841 v1(56.007,63.754) ; U4.8@54.454,59.335 54.498,59.379 55.18,59.379 56.134,60.333 v1(56.134,61.722) ; v3(58.115,63.83) 58.17,63.885 U4.20@60.354,63.885 ; R35.2@61.468,42.926 63.246,41.148 66.04,41.148 66.599,41.148 66.802,40.945 R5.1@66.802,41.148 ; D1.1@69.088,82.55 D1.1@69.088,83.239 ; C2.1@77.111,92.496 C2.1@77.111,92.859 ; 78.74,107.442 R25.2@79.248,107.95 ; v1(83.947,82.55) v1@83.954,82.557 ; P12.1@85.344,80.772 85.344,81.585 v1(86.716,82.956) ; U3.48@89.408,73.732 94.924,73.732 v1(94.996,73.66) ; v1(91.059,81.407) 91.059,81.534 91.227,81.702 U3.32@91.227,83.082 ; v1(97.028,80.899) 97.472,80.899 97.758,81.185 U3.19@97.758,83.082 97.758,95.444 U11.1@98.58,96.266 ; U3.64@98.758,71.882 98.758,73.358 v1(99.06,73.66) 99.132,73.732 U3.1@100.608,73.732 ; R22.1@102.108,98.425 R22.1@102.108,98.806 ; R23.2@105.664,98.806 107.95,101.092 115.697,101.092 C27.1@115.824,101.219 ; P3.1@110.029,86.491 P3.1@110.029,85.852 P3.1@110.156,85.979 ; R33.1@131.191,98.805 R33.1@131.192,98.806
  Top Layer w0.508: R39.2@30.48,52.07 R36.2@33.02,52.07 R37.2@35.56,52.07 R38.2@38.1,52.07 38.1,67.31 C13.1@37.084,68.326 40.926,68.326 C14.1@42.196,69.596 ; v3(37.287,76.175) 37.363,76.251 v3(37.363,83.185) ; U7.8@39.545,39.624 v1(43.053,39.624) ; R32.1@44.651,103.759 48.334,107.442 R24.2@74.676,107.442 78.74,107.442 ; v3(48.819,43.942) 50.114,42.647 v3(52.857,42.647) ; R34.2@56.388,42.926 R40.2@58.928,42.926 ; v1(64.516,39.624) 66.04,41.148 ; R5.1@66.802,40.945 66.802,40.005 P2.2@72.39,34.417 P2.1@72.39,31.877 ; R5.1@66.802,41.148 70.739,41.148 v1(72.644,39.243) ; D1.1@69.088,83.239 U1.1@71.879,86.03 ; U1.1@72.971,86.028 76.681,86.028 C1.2@77.521,86.868 ; v1(76.2,89.408) 76.2,88.189 C1.2@77.521,86.868 ; C2.1@77.111,92.859 v1(78.664,94.412) ; v3(77.47,103.251) 77.47,99.339 78.181,98.628 80.126,98.628 C7.1@82.798,95.956 79.827,95.956 v1(79.502,95.631) ; v1(78.613,38.608) v1(79.883,39.878) ; R25.2@79.248,107.95 R26.2@83.312,107.95 ; v1@83.954,82.557 C8.1@83.954,85.13 82.216,86.868 C1.2@77.521,86.868 ; R8.1@89.154,43.688 89.154,51.841 92.304,54.991 R29.1@94.615,54.991 R28.1@94.615,57.658 R27.1@94.615,59.817 ; U11.1@98.58,96.266 U11.2@98.58,97.536 100.838,97.536 R22.1@102.108,98.806 ; R3.2@107.315,92.329 107.315,89.205 P3.1@110.029,86.491 ; P3.1@110.156,85.979 P4.1@116.302,85.979 ; v3(113.5,108.775) 115.392,110.668 132.131,110.668 v1(132.334,110.871) 132.334,112.776 134.112,114.554 R52.2@134.112,115.443 134.112,115.672 R52.2@134.036,115.748 ; C27.1@115.824,101.219 115.824,99.39 118.44,96.774 U10.16@121.135,96.774 ; v1(131.191,93.98) R33.1@131.191,98.805 ; R33.1@131.192,98.806 133.91,96.088 139.776,96.088 141.732,98.044 137.82,101.956 136.55,101.956 v1(134.112,104.394)
  Bottom Layer w0.254: v1(56.134,61.722) 56.134,63.627 v1(56.007,63.754) 56.083,63.83 v3(58.115,63.83) ; R34.2@56.388,42.672 R34.2@56.388,42.926 ; R30.1@84.137,59.563 84.137,56.325 R31.1@84.455,56.007 84.074,56.007 82.804,57.277 80.518,57.277 79.883,56.642 79.883,44.704 83.439,41.148 R6.1@86.436,41.148 ; R6.1@86.614,41.148 R6.1@86.436,41.148 ; v1(86.716,82.956) 89.51,82.956 v1(91.059,81.407) ; v1(97.028,80.899) 97.028,80.391 94.996,78.359 v1(94.996,73.66) 95.003,73.653 99.053,73.653 v1(99.06,73.66) ; C27.1@115.824,100.838 C27.1@115.824,101.219 ; P6.10@121.539,32.512 P6.9@121.539,29.972 120.408,28.841 88.38,28.841 86.436,30.785 86.436,40.97 R6.1@86.436,41.148
  Bottom Layer w0.508: v3(37.287,76.175) 37.287,74.27 41.961,69.596 C14.1@42.196,69.596 43.72,68.072 46.085,68.072 C15.1@48.498,70.485 C16.1@51.92,70.485 ; v3(37.363,83.185) 37.363,87.605 33.02,91.948 33.02,105.622 U5.1@35.094,107.696 37.126,105.664 42.746,105.664 R32.1@44.651,103.759 47.572,100.838 U8.1@52.593,100.838 ; R38.2@38.1,52.07 38.1,48.895 43.053,43.942 ; v1(43.053,39.624) 43.053,43.942 ; v3(48.819,43.942) 43.053,43.942 ; v3(52.857,42.647) 56.109,42.647 R34.2@56.388,42.926 ; R34.2@56.388,42.672 51.816,38.1 51.816,31.623 52.324,31.115 59.563,31.115 64.516,36.068 v1(64.516,39.624) ; v1(72.644,39.243) 73.279,38.608 v1(78.613,38.608) ; v1(76.2,89.408) 76.2,91.585 C2.1@77.111,92.496 ; v3(77.47,103.251) 77.47,106.172 R25.2@79.248,107.95 ; v1(78.664,94.412) 78.664,94.793 v1(79.502,95.631) ; v1(79.883,39.878) 85.344,39.878 R6.1@86.436,40.97 ; R26.2@83.312,107.95 84.48,109.118 103.175,109.118 ; v1(83.947,82.55) 85.344,81.153 P12.1@85.344,80.772 ; R6.1@86.614,41.148 R7.1@89.154,41.148 R8.1@89.154,43.688 ; P5.1@93.472,62.992 94.615,61.849 R27.1@94.615,59.817 ; R22.1@102.108,98.806 103.784,100.482 103.784,108.509 103.175,109.118 ; R3.2@107.315,92.329 C27.1@115.824,100.838 ; C27.1@115.824,101.219 115.824,101.575 114.224,103.175 114.224,108.052 v3(113.5,108.775) 113.157,109.118 103.175,109.118 ; U6.3@126.213,91.618 U6.3@126.238,91.618 ; P10.2@127.138,87.757 126.238,88.657 U6.3@126.238,91.618 ; v1(131.191,93.98) 128.829,91.618 U6.3@126.238,91.618 ; v1(132.334,110.871) 132.334,106.172 v1(134.112,104.394)
VCC-5V: C3.1 C4.1 D2.1 D3.2 F1.2 J4.6 P11.1 R17.2 U1.4 U1.5 U2.3 | length 123.1
  Top Layer w0.254: P11.1@31.005,78.484 31.875,78.484 32.385,78.994 v1(32.385,80.01) ; C3.1@52.324,94.488 53.213,93.599 v1(63.5,93.599) 63.5,96.012 v1(66.929,99.441)
  Top Layer w0.508: R17.2@63.627,65.151 66.802,68.326 67.774,68.326 U2.3@70.681,71.233
  Top Layer w0.762: C4.1@51.816,84.876 52.97,86.03 U1.5@59.154,86.03 U1.4@59.154,88.57 ; U1.5@60.322,86.028 60.322,84.204 D2.1@61.976,82.55
  Bottom Layer w0.254: F1.2@42.862,85.869 43.748,85.869 ; D3.2@46.869,88.525 D3.2@46.404,88.525 D3.2@47.053,89.174 ; C3.1@52.324,93.98 C3.1@52.324,94.488 ; v1(66.929,99.441) 65.151,101.219 65.151,104.394 66.929,106.172 67.361,106.172 76.378,115.189 79.512,115.189 79.512,116.369 J4.6@79.678,116.535
  Bottom Layer w0.508: v1(32.385,80.01) 37.003,80.01
  Bottom Layer w0.762: 37.003,80.01 F1.2@42.862,85.869 ; 43.748,85.869 D3.2@46.404,88.525 ; C4.1@51.816,84.876 48.167,88.525 46.869,88.525 C3.1@52.324,93.98 ; D2.1@61.976,82.55 63.627,80.899 R17.2@63.627,65.278 R17.2@63.627,65.151
XSMT: R17.1 R21.2 U4.17 | length 15.5
  Top Layer w0.254: U4.17@60.354,61.935 62.443,61.935 R21.2@65.786,65.278
  Bottom Layer w0.254: R17.1@63.627,57.531 R17.1@63.627,57.658 63.627,63.119 R21.2@65.786,65.278
pads on no net: J3.1 J3.4 J3.6 J3.7 J3.8 J3.9 J3.10 J3.11 J4.1 J4.5 J4.10 J4.11 P5.7 P6.3 P11.0 U3.2 U3.3 U3.4 U3.14 U3.62 U5.3 U7.13 U7.14 U9.3 U9.4 U9.5 U9.6 U9.7 U9.8 U9.14 U9.15 U9.16 U9.18 U9.21 U9.22 U9.24 U9.25 U9.26 U9.28 U9.29 U9.31 U9.32 U9.36 U9.37 U9.38 U9.39 U9.40 U9.41 U9.42 U9.46 U9.47 U9.49 U9.50 U9.53 U10.12 U10.14 U11.3 U11.4 U11.5 U11.6 U11.11 U11.12 U11.13 U11.14
copper on no net:
  other v4: 143.764,31.623 29.972,68.961 29.845,121.285 143.967,121.387
  other v5: 51.403,119.338 61.403,119.338
  other v6: 29.004,60.452 35.004,60.452
  other v7: 76.962,50.927 92.202,50.927

## Polygon pours and split planes (outlines as drawn)
GND on Top Layer "Top Layer-GND" (solid, remove dead copper, pour order 14): 27.305,123.825 27.305,43.815 31.115,43.815 31.115,27.94 146.685,27.94 146.685,123.825
GND on Bottom Layer "Bottom Layer-GND" (solid, remove dead copper, pour order 10): 27.305,123.825 27.305,43.815 31.115,43.815 31.115,27.94 146.685,27.94 146.685,123.825

## Other copper
Bottom Layer:
  text "STAmeba@20170708 V1.0" at 61.29,112.827 h1.52

## Silkscreen, mask and mechanical layers (free items; w line width, h text height)
Mechanical 1:
  lines w1: 26.645,27.203 147.396,27.203 147.396,124.511 26.645,124.511 26.645,27.203

## Text inside footprints (layer, text, board x,y; h text height)
J1: Mechanical 1 "Mech 2 - Clearance, move to internal plane if present" at 24.282,96.506 h0.3; Mechanical 1 "Mech 1 - Slot cut-out" at 24.282,97.006 h0.3; Mechanical 1 "Assign keep-out area to slot" at 24.282,98.006 h0.3; Mechanical 1 "Alert PCB fab to slot details" at 24.282,97.506 h0.3
J3: Top Overlay "6" at 110.636,119.587 h1.5; Top Overlay "9" at 118.946,119.587 h1.5; Top Overlay "5" at 120.331,110.187 h1.5; Top Overlay "1" at 109.501,110.187 h1.5
J4: Top Overlay "6" at 79.178,119.64 h1.5; Top Overlay "9" at 87.488,119.64 h1.5; Top Overlay "5" at 88.873,110.24 h1.5; Top Overlay "1" at 78.043,110.24 h1.5
P6: Top Overlay "10" at 123.063,32.004 h1.27; Top Overlay "9" at 123.063,29.464 h1.27; Top Overlay "1" at 109.347,29.464 h1.27; Top Overlay "2" at 108.839,32.004 h1.27
U6: Top Overlay "3" at 128.437,90.853 h1.5; Top Overlay "1" at 128.437,93.448 h1.5